# Altium PCB ArgoFC.PcbDoc (part 4 of 5)
Units mm, origin at the board's own origin, x right, y up, seen from the top; angles counter-clockwise.
Board outline 177.8 x 177.8 mm, 4 copper layers (Top Layer, GND Plane, PWR Plane, Bottom Layer), stack 0.603 mm thick; 373 components, 236 nets, 1289 pads, 686 vias.
Unrouted connection lines stored in the file: 16.
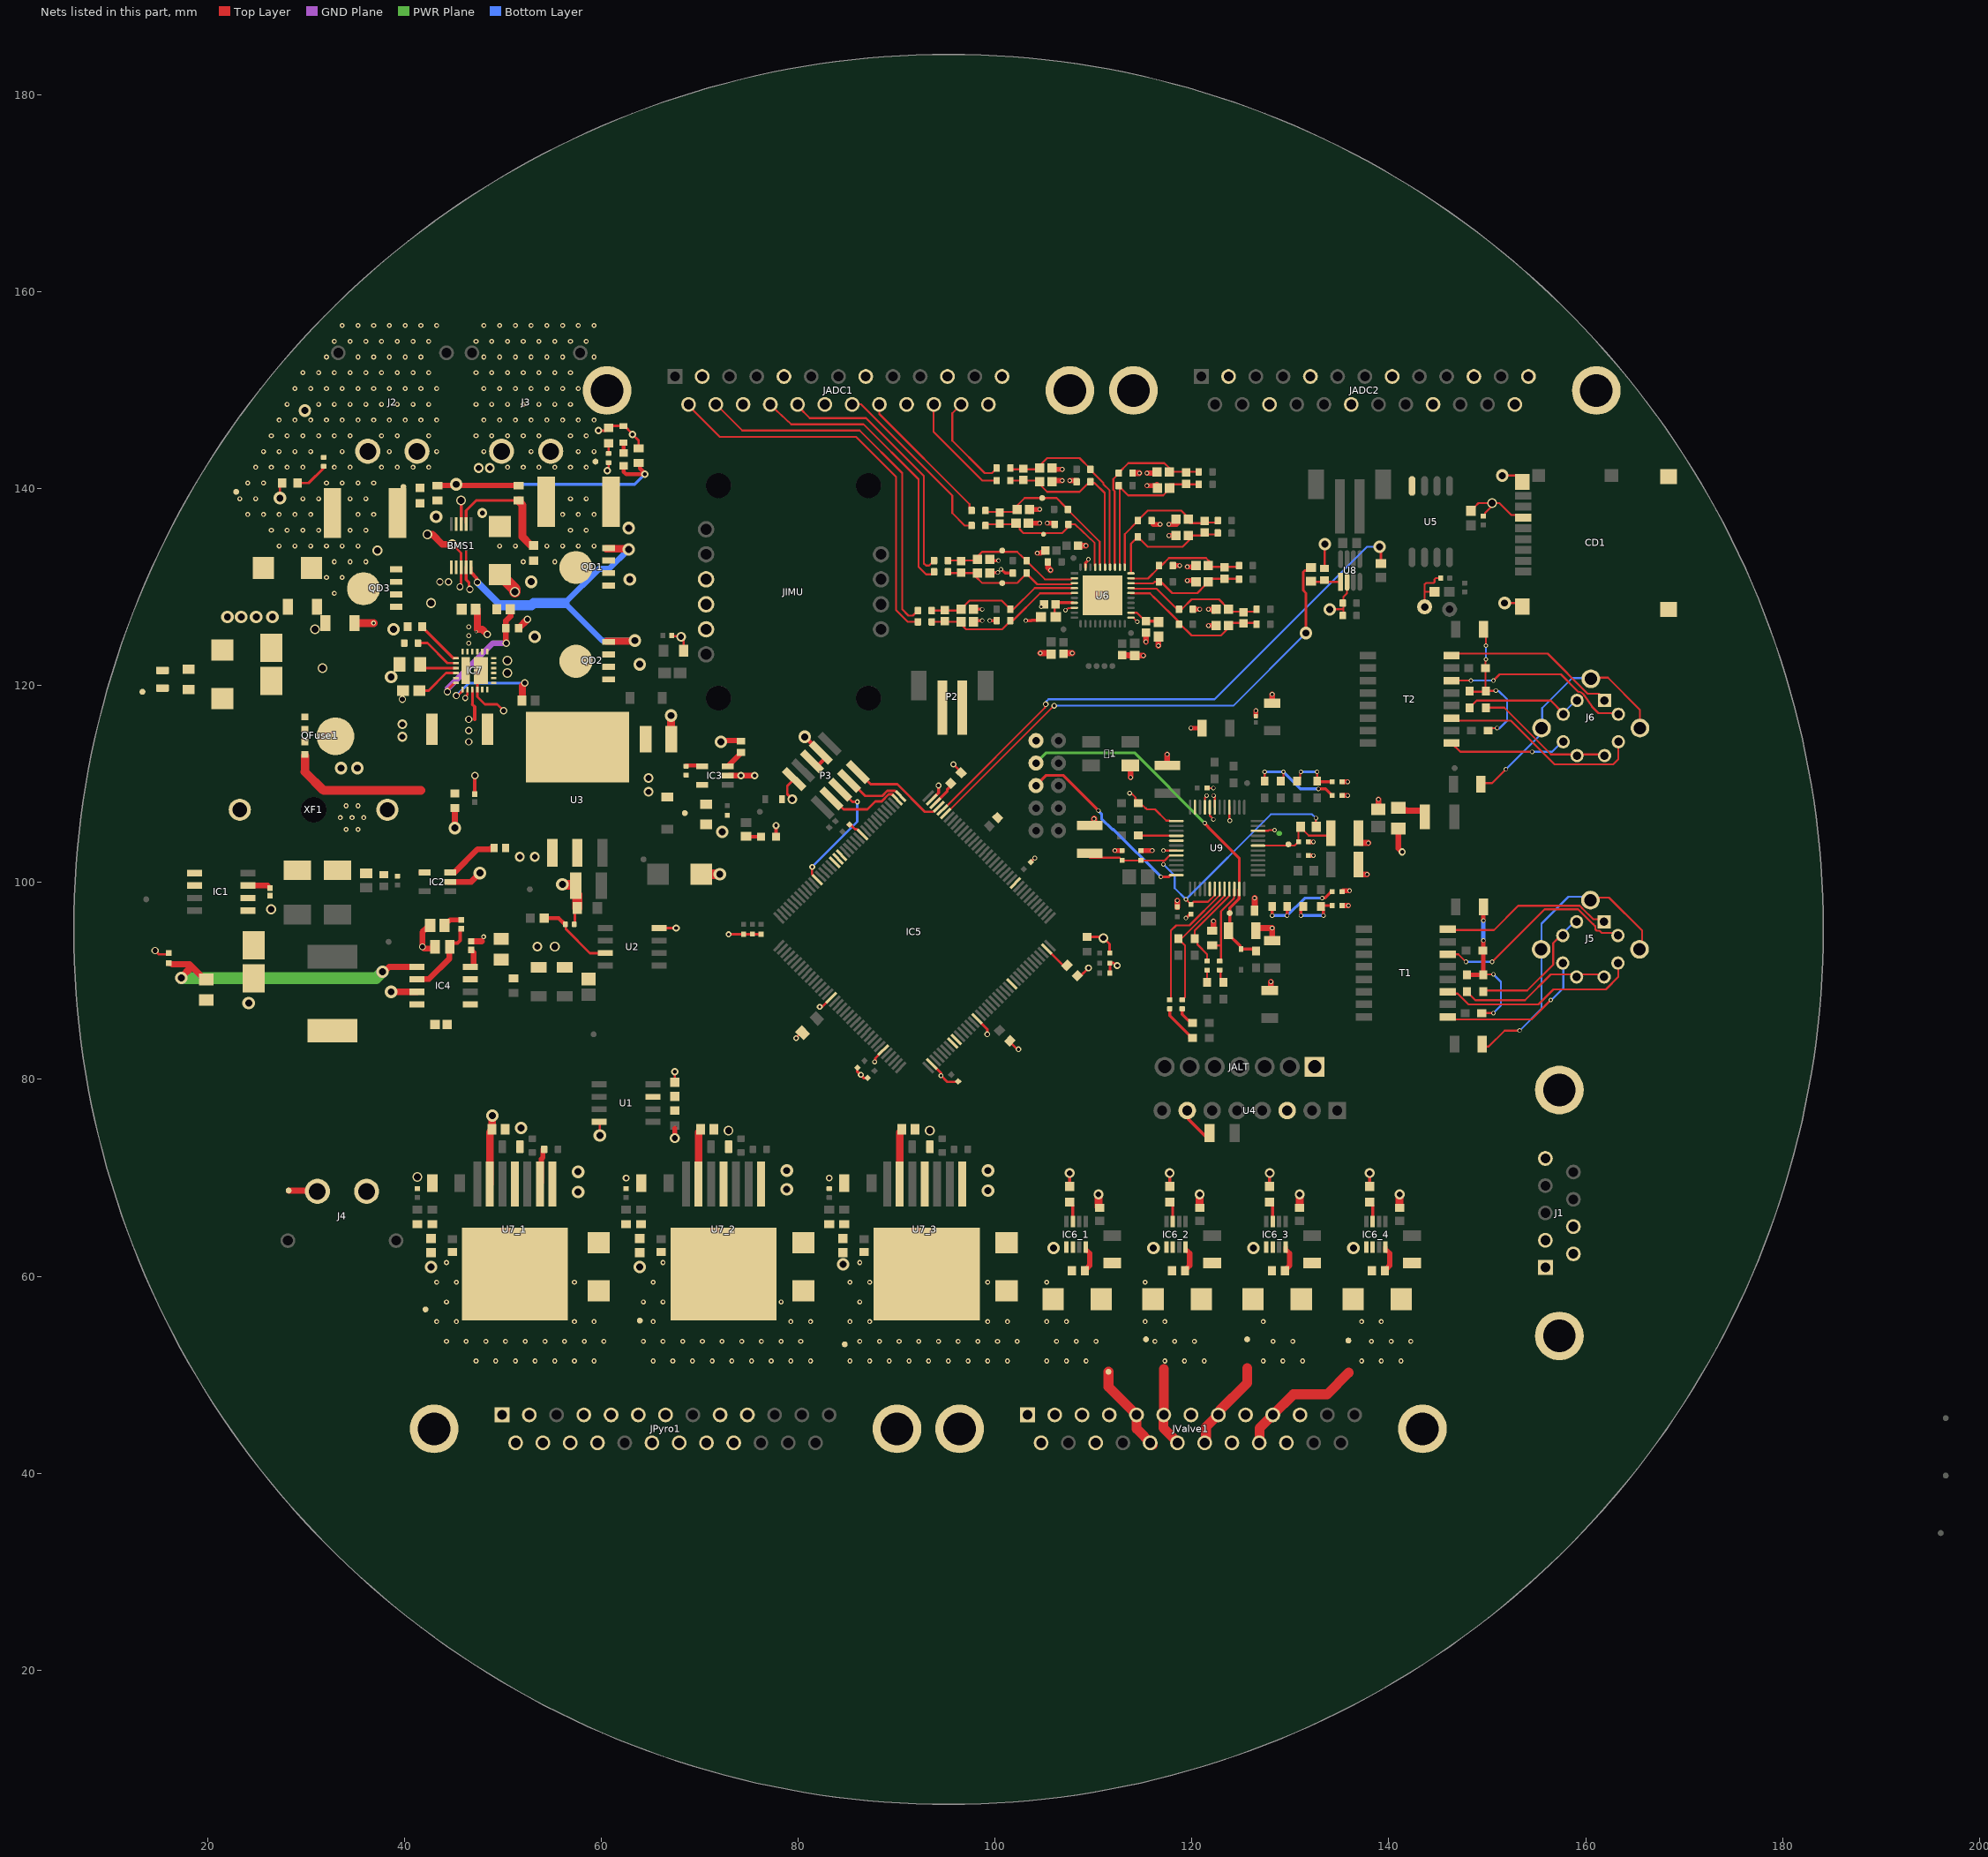
[diagram p5: the nets of this part, all layers, seen from the top]

## Via types
v1: diameter 0.5, hole 0.25, Top Layer to Bottom Layer, 327 vias
v2: diameter 0.45, hole 0.3, Top Layer to Bottom Layer, 147 vias
v3: diameter 1.27, hole 0.711, Top Layer to Bottom Layer, 80 vias
v4: diameter 1, hole 0.6, Top Layer to Bottom Layer, 28 vias
v5: diameter 1, hole 0.7, Top Layer to Bottom Layer, 21 vias
v6: diameter 0.75, hole 0.5, Top Layer to Bottom Layer, 17 vias
v7: diameter 0.5, hole 0.3, Top Layer to Bottom Layer, 15 vias
v8: diameter 0.7, hole 0.4, Top Layer to Bottom Layer, 14 vias
v9: diameter 0.75, hole 0.4, Top Layer to Bottom Layer, 12 vias
v10: diameter 0.6, hole 0.35, Top Layer to Bottom Layer, 7 vias
v11: diameter 0.6, hole 0.3, Top Layer to Bottom Layer, 5 vias
v12: diameter 0.7, hole 0.5, Top Layer to Bottom Layer, 3 vias
v13: diameter 0.6, hole 0.4, Top Layer to Bottom Layer, 2 vias
v14: diameter 2, hole 1.2, Top Layer to Bottom Layer, 2 vias
v15: diameter 7.62, hole 7.62, Top Layer to Bottom Layer, 2 vias
v16: diameter 1, hole 0.5, Top Layer to Bottom Layer, 1 vias
v17: diameter 0.711, hole 0.711, Top Layer to Bottom Layer, 1 vias
v18: diameter 1, hole 0.711, Top Layer to Bottom Layer, 1 vias
v19: diameter 0.3, hole 0.2, Top Layer to Bottom Layer, 1 vias

## Nets (pads, with @x,y where several pads share a name; then routed paths per layer and width w, separated by ;. In a path a pad name is that pad's centre, name@x,y a point inside that pad or via, vN(x,y) a via of type N, cw(c..) or ccw(c..) an arc to the next point about the centre after c; other vN are vias at no path point) (continued)
ENC28J60_RST_3.3V: C99.2 D14.1 pad.15 R72.2 TP30.1 U9.47 | length 36.4
  Top Layer w0.3: v2(121.285,106.045) 121.285,106.004 121.643,105.646 121.643,105.615 124.805,102.453 U9.47@124.805,99.354 ; C99.2@123.695,95.123 123.695,94.748 124.893,93.55 124.893,93.293 D14.1@124.968,93.218 ; C99.2@123.825,95.758 TP30.1@123.825,96.901 123.825,97.419 124.776,98.37 U9.47@124.776,99.325 ; D14.1@124.968,93.257 126.083,93.257 126.122,93.218 R72.2@126.365,93.218
  PWR Plane w0.3: pad.15@104.267,112.268 105.179,113.18 114.15,113.18 v2(121.285,106.045)
  Bottom Layer w0.3: pad.15@104.14,112.268 pad.15@104.267,112.268
ENC28J60_SCLK_3.3V: pad.16 U9.36 | length 19.3
  Top Layer w0.3: pad.16@104.14,109.855 105.179,110.894 106.911,110.894 v2(110.49,107.315) ; v2(116.84,100.584) 117.657,100.584 117.828,100.755 U9.36@118.404,100.755
  Bottom Layer w0.3: v2(110.49,107.315) 110.49,107.274 110.807,106.957 110.807,106.489 111.893,105.404 112.02,105.404 v2(116.84,100.584)
ETH_CRS_DV: U9.16 | length 1.3
  Top Layer w0.24: v7@123.805,106.32 U9.16@123.805,107.656
  other v7: 123.825,106.299
ETH_REF_CLK: U9.23
ETH_RXD0: IC5.127 U9.20 | length 1
  Top Layer w0.2: U9.20@121.793,107.315 121.793,106.807 v2(122.174,106.426)
ETH_RXD1: IC5.128 U9.19 | length 1.2
  Top Layer w0.2: U9.19@122.305,107.656 v2@122.305,108.824
  other v2: 122.185,108.839
ETH_TX_EN: IC5.126 R81.1 U9.25 | length 5.2
  Top Layer w0.2: v7@113.843,109.053 114.236,108.66 114.236,108.377 114.251,108.362 114.484,108.362 115.285,107.561 115.313,107.561 115.432,107.442 116.234,107.442 117.377,106.299 U9.25@117.729,106.299
  other v7: 113.665,109.093
ETH_TXD0: IC5.44 U9.29
ETH_TXD1: IC5.45 R85.2 U9.28 | length 3.2
  Top Layer w0.2: R85.2@114.515,104.775 U9.28@117.729,104.775
EXT_UART_RX_3.3V: P2.1
EXT_UART_TX_3.3V: P2.2
FDCAN2_RX: IC5.103 R68.1 | length 51.5
  Top Layer w0.2: IC5.103@94.973,107.012 95.007,107.012 105.958,117.964 v10(105.992,117.964)
  Top Layer w0.254: v3(131.572,125.349) 131.572,129.423 131.301,129.694 131.301,131.546 131.45,131.695 131.757,131.695 R68.1@132.08,132.018
  Bottom Layer w0.2: v10(105.992,117.964) 124.187,117.964 v3(131.572,125.349)
FDCAN2_TX: IC5.104 R69.1 | length 56.8
  Top Layer w0.2: IC5.104@95.123,107.823 105.062,117.762 105.062,118.051 v10(105.138,118.128)
  Top Layer w0.254: R69.1@139.192,132.334 v3@139.192,133.985
  Bottom Layer w0.2: v10(105.138,118.128) 105.215,118.204 105.215,118.423 105.41,118.618 122.301,118.618 137.795,134.112 v3(139.065,134.112)
GND: 1.2 BMS1.3 C1.1 C2.2 C3.2 C4.1 C5.1 C6.1 C7.2 C9.2 C10.2 C11.2 C12.2 C13.2 C14.1 C15.1 C20.2 C21.1 C22.2 C25.2 C26.2 C27.2 C28.2 C29.2 C30.2 C31.2 C32.2 C33.2 C34.2 C35.2 C36.2 C37.2 C38.2 C39.2 C40.2 C43_1.2 C43_2.2 C48.2 C49.2 C50.2 C51.2 C52_1.1 C52_2.1 C52_3.1 C52_4.1 C55.2 C57.2 C58.2 C59.2 C60.2 C61.2 C62.2 C64.2 C65.2 C67.2 C68.2 C70.2 C71.2 C72.2 C73.2 C74.2 C75.2 C77.2 C78.2 C79.2 C81.2 C82.2 C83.2 C84.2 C86.2 C87.2 C89.2 C91_1.1 C91_2.1 C91_3.1 C92.2 C93.2 C94.2 C97.2 C98.1 C99.1 C100.1 C101.2 C102.2 C103.2 C104.2 C105.2 C106.1 C107.2 C108.2 C109.1 C110.1 C111.1 C112.2 C113.2 C114.1 C117.2 C118.2 C121.1 CD1.6 CD1.11 CD1.12 CD1.13 CD1.14 Cg1.2 Citimer1.2 CRetry1.2 D1.2 D3.2 D5.2 D6.1 D7.1 D7_1.2 D7_2.2 D7_3.2 D9.2 D10.1 D11.2 D12.2 IC1.5 IC1.6 IC2.2 IC3.2 IC4.7 IC5.16 IC5.31 IC5.38 IC5.51 IC5.61 IC5.83 IC5.107 IC5.120 IC6_1.5 IC6_2.5 IC6_3.5 IC6_4.5 IC7.4 IC7.5 IC7.11 IC7.14 IC7.26 J1.5 J1.M1 J1.M2 J2.1 J3.1 J4.1 JADC1.2 JADC1.5 JADC1.8 JADC1.11 JADC1.13 JADC1.16 JADC1.19 JADC1.22 JADC1.25 JADC1.M1 JADC1.M2 JADC2.2 JADC2.5 JADC2.8 JADC2.11 JADC2.13 JADC2.16 JADC2.19 JADC2.22 JADC2.25 JADC2.M1 JADC2.M2 JALT.1 JIMU.3 JPyro1.4 JPyro1.5 JPyro1.9 JPyro1.10 JPyro1.16 JPyro1.17 JPyro1.21 JPyro1.22 JValve1.3 JValve1.4 JValve1.7 JValve1.9 JValve1.11 JValve1.16 JValve1.21 JValve1.23 JValve1.M1 JValve1.M2 P3.3 P3.5 P3.9 pad.8 pad.14 R1.1 R4.1 R5.1 R6.2 R7.2 R11.1 R12.1 R18_1.1 R18_2.1 R18_3.1 R18_4.1 R38.2 R39.2 R40.2 R41.2 R42.2 R43.2 R44.2 R45.2 R51.1 R58.2 R60.1 R61.1 R66_1.1 R66_2.1 R66_3.1 R67_1.1 R67_2.1 R67_3.1 R74.2 R75.2 R95.1 RC1.1 RIlimit1.1 RIMON1.1 RS2_1.2 RS2_2.2 RS2_3.2 U1.8 U2.8 U3.1 U4.3 U5.4 U6.8 U6.21 U6.39 U6.41 U7_1.1 U7_2.1 U7_3.1 U8.2 U9.10 U9.21 U9.31 U9.41 | length 187.8
  Top Layer w0.2: v2(107.139,127.671) 107.206,127.671 107.417,127.881 107.97,127.881 U6.8@107.995,127.907 ; v2(112.158,103.251) v2@112.162,103.247 ; C103.2@112.899,103.247 C103.2@112.903,103.243 ; 1.2@113.728,111.9 1.2@113.76,111.868 ; U6.21@113.747,126.909 114.01,126.909 v2(114.427,126.492) ; v2@115.943,103.243 v2(115.951,103.251) v2@115.953,103.253 ; v2(117.094,103.251) 117.098,103.255 U9.31@118.404,103.255 ; U9.21@121.305,107.656 121.313,107.664 121.313,108.604 121.481,108.771 v2(121.481,108.839) ; C108.2@121.658,109.601 v2(122.174,109.601) ; U9.10@126.706,105.255 126.714,105.263 127.772,105.263 127.843,105.334 v2(128.397,105.334) ; C94.2@133.477,131.965 v3@133.477,134.239 ; v3(133.985,127.762) 135.382,127.762 ; C93.2@135.317,127.127 135.382,127.192 135.382,127.762 ; U8.2@135.748,130.556 135.748,129.398 135.382,129.032 135.382,127.762 ; pad.8@143.637,128.016 143.637,129.54 ; C49.2@144.653,129.54 143.637,129.54 ; C48.2@145.288,130.937 144.78,130.937 144.653,130.81 144.653,130.546 144.536,130.429 143.764,130.429 143.637,130.302 143.637,129.54 ; C51.2@148.336,137.783 148.336,137.808 148.736,138.208 148.761,138.208 149.11,138.557 v5@150.368,138.557 ; C50.2@149.733,137.177 149.781,137.225 149.781,137.553 150.342,138.114 150.342,138.404 v5(150.495,138.557) 151.239,138.557 152.449,137.347 CD1.6@153.651,137.347 ; v3(151.511,141.351) CD1.14@153.561,141.351 ; v3(151.765,128.397) CD1.13@153.67,128.397 ; CD1.14@153.561,140.957 CD1.14@153.857,141.253
  Top Layer w0.254: v6(14.605,93.091) 14.621,93.091 15.002,92.71 15.858,92.71 R12.1@16.002,92.854 ; v3(27.305,139.065) 27.305,140.335 R61.1@27.432,140.462 ; v13(46.136,118.745) 46.136,118.866 46.36,119.09 IC7.14@46.36,119.465 ; v9(59.69,145.923) 60.411,145.923 60.706,146.218 60.706,146.397 D11.2@62.23,146.397 ; v3@59.817,74.422 U1.8@59.817,75.692 ; D11.2@62.23,146.392 62.33,146.392 63.119,145.603 v9(63.119,145.542) 63.754,144.907 R58.2@63.754,144.145 ; R5.1@67.056,125.095 67.12,125.031 68.008,125.031 v4(68.072,124.968) 68.072,124.766 68.326,124.512 C7.2@68.326,123.698 ; R1.1@67.437,80.01 v9(67.437,80.772) ; v11(72.898,94.742) C28.2@76.077,94.742 ; v4(79.375,108.458) 79.375,108.472 78.867,108.98 78.867,109.812 P3.9@79.569,110.514 ; v11(79.756,84.201) 80.264,84.709 C38.2@80.391,84.709 ; v11(82.169,87.376) 82.235,87.442 82.474,87.442 IC5.16@83.323,88.291 ; C29.2@85.016,105.891 85.126,105.78 85.196,105.851 85.323,105.851 85.755,105.419 85.945,105.419 86.473,104.891 IC5.120@86.505,104.891 ; v7(87.757,81.788) 87.804,81.835 87.804,82.165 IC5.31@88.627,82.988 ; IC5.107@93.726,108.585 IC5.107@93.726,108.626 ; IC5.38@93.853,81.28 94.488,80.645 v7(94.488,80.391) 95.123,79.756 C26.2@96.266,79.756 ; v10(95.758,112.014) C43_2.2@96.523,111.249 ; IC5.51@98.552,85.725 99.187,85.09 v10(99.187,84.582) ; C40.2@101.473,83.82 v10@102.235,83.058 ; C25.2@103.632,102.108 v7@103.886,102.362 ; C43_1.2@108.331,90.424 108.585,90.424 v8(109.474,91.313) ; C37.2@109.22,94.488 110.998,94.488 110.998,94.389 111.625,93.762 C27.2@111.625,92.837 ; C32.2@111.625,90.805 111.664,90.844 C31.2@111.664,91.821 ; C31.2@111.625,91.821 111.628,91.824 112.017,91.824 112.274,91.567 v8(112.395,91.567)
  Top Layer w0.3: BMS1.3@45.72,136.882 v5(45.72,138.811) ; R4.1@57.277,95.758 57.277,96.774 ; U2.8@65.405,95.377 v9@67.31,95.377 ; C34.2@85.979,81.159 85.979,80.772 86.614,80.137 C33.2@86.995,80.137 ; IC5.107@93.726,108.626 94.234,109.134 v10(94.234,109.855) ; C60.2@97.526,127.762 v2(98.679,127.762) ; C64.2@97.78,126.492 97.907,126.619 v2(98.679,126.619) ; C59.2@99.431,131.445 99.495,131.509 v2(100.266,131.509) ; C55.2@99.431,132.842 99.558,132.715 v2(100.33,132.715) ; v2(99.441,126.619) R39.2@100.138,126.619 ; v2(100.584,131.826) 100.624,131.826 101.006,131.445 R38.2@101.789,131.445 ; v2(103.107,126.619) 103.673,126.619 103.704,126.65 104.31,126.65 C72.2@104.66,127 ; v2(104.665,128.016) 104.919,128.27 C71.2@104.962,128.27 ; R18_1.1@107.569,69.088 v4(107.569,70.485) ; U6.39@109.166,132.015 109.166,132.494 109.474,132.801 v2(109.474,132.842) ; R18_2.1@117.729,69.088 v4(117.729,70.485) ; v2(119.38,96.393) 119.38,96.401 C104.2@119.888,96.909 ; R18_3.1@127.889,69.088 v4(127.889,70.485) ; R18_4.1@138.049,69.088 v4(138.049,70.485)
  Top Layer w0.35: C2.2@47.117,108.896 v6(47.117,110.871) ; D7.1@77.712,104.648 77.724,104.66 v8(77.724,105.791)
  Top Layer w0.4: v3(80.645,114.808) 80.654,114.808 82.633,112.829 82.633,112.82 82.651,112.802 82.651,112.58 P3.5@82.085,112.014
  Top Layer w0.45: v2(119.888,115.697) C111.1@121.028,115.697 ; C101.2@131.818,102.743 v2(132.334,102.743) ; C97.2@131.818,104.14 v2(132.334,104.14) ; C100.1@136.909,101.854 136.909,101.088 C100.1@137.159,100.838
  Top Layer w0.5: v3(67.056,116.967) v3@67.071,116.952 ; C89.2@103.495,136.398 103.622,136.525 v2(104.521,136.525) ; C87.2@103.495,137.668 103.749,137.922 v2(104.521,137.922) ; v2(104.267,133.477) 104.621,133.477 104.7,133.556 104.914,133.556 C79.2@105.089,133.731 ; v2(105.283,136.525) 105.965,136.525 106.045,136.445 R45.2@106.045,136.398 ; C84.2@105.654,142.113 105.781,141.986 v2(106.807,141.986) ; C86.2@105.781,140.843 v2(106.807,140.843) ; v2(107.569,140.843) R44.2@108.266,140.843 ; v2@112.162,103.247 C103.2@112.899,103.247 ; C105.2@114.808,103.243 v2@115.943,103.243 ; v2(115.413,140.335) 116.312,140.335 C78.2@116.439,140.462 ; v2(115.413,141.605) 116.312,141.605 C81.2@116.439,141.732 ; 116.058,136.398 v2(116.755,136.398) ; v2(117.644,135.255) C75.2@118.543,135.255 ; v2(117.644,136.398) 118.416,136.398 C77.2@118.543,136.525 ; R41.2@118.292,132.207 v2(118.745,132.207) ; v2(119.507,130.683) C68.2@120.269,130.683 ; v2(119.507,132.08) C70.2@120.396,132.08 ; R40.2@120.337,127.762 v2(120.777,127.762) ; v2(121.666,126.111) 122.314,126.111 C65.2@122.466,126.263 ; v2(121.666,127.762) 121.983,127.762 C67.2@122.212,127.533 ; C121.1@126.492,116.916 v2(126.492,117.475) ; C112.2@135.247,97.663 v2(135.89,97.663) ; C113.2@135.247,99.06 135.364,99.177 v2(136.007,99.177) ; C117.2@135.247,108.839 v2(135.821,108.839) ; C118.2@135.247,110.236 v2(135.821,110.236)
  Top Layer w0.55: v3@72.136,114.427 R7.2@74.168,114.427
  Top Layer w0.6: C22.2@42.581,95.758 42.581,95.607 42.354,95.38 42.203,95.38 41.783,94.96 v12(41.783,93.472) 41.81,93.472 41.998,93.284 42.89,93.284 C20.2@42.89,93.726 ; IC2.2@44.45,100.076 46.736,100.076 ; v3(45.085,105.537) Cg1.2@45.085,107.569 ; IC3.2@73.025,110.871 v9(75.565,110.871) ; v2(104.577,123.317) C58.2@105.654,123.317 ; C82.2@105.345,132.588 105.375,132.558 105.375,131.988 v2(105.621,131.742) ; C57.2@107.001,123.317 v2(107.823,123.317) ; C83.2@108.398,134.239 v2(109.22,134.239) ; C102.2@109.601,105.794 109.87,105.794 110.045,105.969 v2(110.045,106.489) ; C61.2@112.903,123.098 113.513,123.098 113.538,123.073 ; 113.538,123.063 v2(115.062,123.063) ; v2(113.76,110.687) 1.2@113.76,111.868 ; R43.2@113.954,141.605 v2(114.651,141.605) ; v2(115.316,124.46) C73.2@115.316,125.409 ; v2(116.586,124.079) 116.586,124.755 116.659,124.828 C74.2@116.713,124.828 ; C106.1@117.475,111.89 v2(117.475,113.03) ; C107.2@118.491,97.528 v2(118.491,98.171) ; R95.1@122.174,95.111 122.175,95.112 v2(122.175,96.08) ; R74.2@126.353,97.155 126.365,97.167 v2(126.365,98.425) ; C99.1@126.495,95.123 126.495,95.202 126.67,95.377 v2(128.143,95.377) C109.1@128.143,94.11 ; C110.1@127.889,89.03 128.016,89.157 v2(128.016,89.916) ; C114.1@128.143,118.24 v2(128.143,119.126) ; C98.1@136.909,105.029 136.909,104.204 137.084,104.029 137.906,104.029 v2(137.922,104.013) ; C100.1@137.159,100.838 v2(137.795,100.838) ; v2(138.938,108.458) 138.938,107.95 R75.2@139.065,107.823 ; RC1.1@140.97,105.503 140.97,103.475 141.321,103.124 v9(141.351,103.124)
  Top Layer w0.65: C21.1@46.736,94.039 47.82,94.039 ; 46.736,100.076 v3(47.625,100.965)
  Top Layer w0.7: v3(38.608,88.9) IC4.7@41.23,88.9 ; R60.1@51.577,125.857 52.441,126.721 52.441,126.736 v6(52.451,126.746)
  Top Layer w0.8: C4.1@34.876,126.365 v7(36.83,126.365) ; C11.2@67.071,114.696 v3@67.071,116.952 ; C52_1.1@110.49,67.056 v4(110.49,68.326) ; C52_2.1@120.777,67.056 v4(120.777,68.326) ; C52_3.1@130.937,67.056 v4(130.937,68.326) ; C52_4.1@141.097,67.056 v4(141.097,68.326)
  Top Layer w1: v3(56.007,99.822) 56.059,99.77 57.299,99.77 C12.2@57.374,99.695 57.374,98.945 57.522,98.797 C9.2@57.522,97.409 ; D3.2@70.145,100.838 v3(72.009,100.838)
  Top Layer w1.2: D9.2@49.53,130.937 50.051,130.937 51.181,129.807 v5(51.181,129.54)
  PWR Plane w0.5: 128.834,104.996 128.898,104.996
  other v3: 105.918,62.865 116.078,62.865 126.238,62.865 136.398,62.865 57.61,68.58 99.266,68.707 78.819,68.834 57.61,70.612 78.819,70.739 99.266,70.739 59.817,74.295 51.816,75.057 72.263,105.156 72.136,114.3 38.608,120.904 38.862,125.73 21.971,127 23.368,127 24.892,127 26.543,127 133.49,134.399
  other v4: 53.467,93.5 110.998,94.361 51.689,102.616 53.213,102.616
  other v5: 41.275,70.104 72.898,74.803 93.345,74.803 55.245,93.5 26.416,97.282
  other v6: 39.751,118.618
  other v7: 48.006,94.488 104.013,102.489 46.482,124.333 46.482,125.095 46.482,125.984
  other v8: 62.484,69.977 83.131,69.977
  other v9: 67.564,95.377 74.168,110.871
  other v10: 102.362,83.058
  other v11: 86.342,80.475
GPIO0: J1.1
GPIO1: J1.6
GPIO2: J1.2
GPIO3: J1.7
IMU_SCL_3.3V: JIMU.5
IMU_SDA_3.3V: JIMU.4
Isense1: IC6_1.3 R18_1.2 | length 2.1
  Top Layer w0.3: R18_1.2@107.569,67.526 107.579,67.526 107.879,67.226 IC6_1.3@107.879,65.562
Isense2: IC6_2.3 R18_2.2 | length 2.1
  Top Layer w0.3: R18_2.2@117.729,67.526 117.739,67.526 118.039,67.226 IC6_2.3@118.039,65.562
Isense3: IC6_3.3 R18_3.2 | length 2.1
  Top Layer w0.3: R18_3.2@127.889,67.526 127.899,67.526 128.199,67.226 IC6_3.3@128.199,65.562
Isense4: IC6_4.3 R18_4.2 | length 2.1
  Top Layer w0.3: R18_4.2@138.049,67.526 138.059,67.526 138.359,67.226 IC6_4.3@138.359,65.562
Isense5: R67_1.2 U7_1.6 | length 6.9
  Top Layer w0.75: U7_1.6@48.641,69.372 48.641,74.641 48.78,74.78 48.78,74.855 48.875,74.95 48.875,76.18 v3@48.895,76.2
  other v3: 48.895,76.327
Isense6: R67_2.2 U7_2.6 | length 5.3
  Top Layer w0.75: U7_2.6@69.85,69.372 R67_2.2@69.85,74.641
Isense7: R67_3.2 U7_3.6 | length 5.3
  Top Layer w0.75: U7_3.6@90.297,69.372 R67_3.2@90.297,74.641
JTCK: IC5.109 P3.4 | length 4.5
  Top Layer w0.254: P3.4@86.106,109.474 86.774,108.806 88.533,108.806 89.035,109.308 89.828,109.308 IC5.109@90.043,109.093
JTDI: IC5.110 P3.8 | length 6
  Top Layer w0.254: P3.8@84.328,107.696 84.582,107.442 86.995,107.442 87.8,108.247 88.459,108.247 89.167,108.955 89.546,108.955 IC5.110@89.599,108.902
JTDO: IC5.133 P3.6 | length 11.5
  Top Layer w0.254: 81.407,100.838 81.381,100.864 81.381,101.574 v11(81.407,101.6) ; P3.6@84.243,109.432 85.471,108.204 v7(85.979,108.204)
  Bottom Layer w0.254: v11(81.407,101.6) 85.979,106.172 v7(85.979,108.204)
JTMS: IC5.105 P3.2 | length 9.6
  Top Layer w0.254: P3.2@86.039,111.228 86.102,111.228 87.348,109.982 90.043,109.982 92.837,107.188 93.702,107.188 93.899,107.385 IC5.105@93.932,107.385
LOAD_1: C54_1.2 D8_1.1 IC6_1.6 JValve1.5 JValve1.18 TP15_1.1 | length 9.3
  Top Layer w1: TP15_1.1@111.506,50.292 111.506,48.774 JValve1.5@114.36,45.92 114.36,44.517 JValve1.18@115.99,42.887
  other v1: 105.235,51.395 107.235,51.395 109.235,51.395 106.235,53.395 108.235,53.395 110.235,53.395 105.235,55.395 107.235,55.395 105.235,59.395
LOAD_2: C54_2.2 D8_2.1 IC6_2.6 JValve1.6 JValve1.19 TP15_2.1 | length 7.5
  Top Layer w1: JValve1.6@117.094,45.593 117.094,44.577 JValve1.19@118.364,43.307 ; JValve1.6@117.13,45.92 117.13,50.601
  other v1: 117.235,51.395 119.235,51.395 121.235,51.395 116.235,53.395 118.235,53.395 120.235,53.395 115.235,55.395 117.235,55.395 115.235,59.395
LOAD_3: C54_3.2 D8_3.1 IC6_3.6 JValve1.8 JValve1.20 TP15_3.1 | length 8.8
  Top Layer w1: JValve1.20@121.412,43.18 121.381,43.211 121.381,43.529 121.412,43.561 121.412,44.662 JValve1.8@122.67,45.92 ; JValve1.8@122.809,46.355 125.603,49.149 125.603,50.673
  other v1: 127.235,51.395 129.235,51.395 131.235,51.395 128.235,53.395 130.235,53.395 127.235,55.395
LOAD_4: C54_4.2 D8_4.1 IC6_4.6 JValve1.10 JValve1.22 TP15_4.1 | length 12.9
  Top Layer w1: JValve1.22@126.873,43.053 126.873,44.583 JValve1.10@128.21,45.92 130.296,48.006 133.731,48.006 135.937,50.212
  other v1: 137.235,51.395 139.235,51.395 141.235,51.395 138.235,53.395 140.235,53.395 142.235,53.395 137.235,55.395 139.235,55.395
LOAD_5: C92_1.1 D7_1.1 JPyro1.1 JPyro1.2 JPyro1.14 JPyro1.15 RS1_1.1 TP28_1.1 U7_1.4 U7_1.8
  other v1: 47.235,51.395 49.235,51.395 51.235,51.395 53.235,51.395 55.235,51.395 57.235,51.395 59.235,51.395 44.235,53.395 46.235,53.395 48.235,53.395 50.235,53.395 52.235,53.395 54.235,53.395 56.235,53.395 58.235,53.395 60.235,53.395 43.235,55.395 45.235,55.395 57.235,55.395 59.235,55.395 44.235,57.395 43.235,59.395 45.235,59.395 57.235,59.395 44.235,61.395
  other v3: 42.672,60.959
LOAD_6: C92_2.1 D7_2.1 JPyro1.6 JPyro1.7 JPyro1.19 JPyro1.20 RS1_2.1 TP28_2.1 U7_2.4 U7_2.8
  other v1: 65.235,51.395 67.235,51.395 69.235,51.395 71.235,51.395 73.235,51.395 75.235,51.395 77.235,51.395 79.235,51.395 81.235,51.395 64.235,53.395 66.235,53.395 68.235,53.395 70.235,53.395 72.235,53.395 74.235,53.395 76.235,53.395 78.235,53.395 80.235,53.395 65.235,55.395 79.235,55.395 81.235,55.395 64.235,57.395 66.235,57.395 78.235,57.395 65.235,59.395 66.235,61.395
  other v3: 63.881,60.959
LOAD_7: C92_3.1 D7_3.1 JValve1.1 JValve1.2 JValve1.14 RS1_3.1 TP28_3.1 U7_3.4 U7_3.8
  other v1: 85.235,51.395 87.235,51.395 89.235,51.395 91.235,51.395 93.235,51.395 95.235,51.395 97.235,51.395 99.235,51.395 101.235,51.395 86.235,53.395 88.235,53.395 90.235,53.395 92.235,53.395 94.235,53.395 96.235,53.395 98.235,53.395 100.235,53.395 102.235,53.395 85.235,55.395 87.235,55.395 99.235,55.395 101.235,55.395 86.235,57.395 85.235,59.395 87.235,59.395 99.235,59.395 86.235,61.395
  other v3: 84.528,61.214
Net1_3: 1.3 TP31.1 U9.14 | length 17.6
  Top Layer w0.3: 1.3@113.665,114.3 113.781,114.184 123.941,114.184 125.603,112.522 125.603,109.982 124.805,109.184 U9.14@124.805,107.91
NetBMS1_2: BMS1.2 R52.1 R53.2 | length 12.1
  Top Layer w0.28: BMS1.2@46.228,136.525 46.228,137.795 47.256,138.823 R53.2@51.562,138.823
  Top Layer w0.8: R53.2@51.562,138.823 51.662,138.823 51.662,138.647 51.955,138.354 51.955,135.131 R52.1@52.751,134.335
NetBMS1_4: BMS1.4 R57.2 R59.2
  other v3: 43.18,137.16
NetBMS1_6: BMS1.6 QD3.4
NetBMS1_7: BMS1.7 D12.1 DQ2.1 J2.2 LED2.2 QD3.5-6-7-8 TP26.1
  other v1: 32.835,129.395 32.035,130.995 33.635,130.995 32.835,132.595 34.435,132.595 36.035,132.595 27.235,134.195 28.835,134.195 30.435,134.195 32.035,134.195 33.635,134.195 35.235,134.195 26.435,135.795 28.035,135.795 29.635,135.795 31.235,135.795 34.435,135.795 36.035,135.795 24.035,137.395 25.635,137.395 27.235,137.395 28.835,137.395 30.435,137.395 35.235,137.395 36.835,137.395 23.235,138.995 24.835,138.995 29.635,138.995 31.235,138.995 34.435,138.995 36.035,138.995 24.035,140.595 25.635,140.595 32.035,140.595 33.635,140.595 35.235,140.595 36.835,140.595 24.835,142.195 26.435,142.195 28.035,142.195 29.635,142.195 32.835,142.195 34.435,142.195 37.635,142.195 39.235,142.195 40.835,142.195 42.435,142.195 25.635,143.795 27.235,143.795 28.835,143.795 30.435,143.795 33.635,143.795 38.435,143.795 43.235,143.795 26.435,145.395 28.035,145.395 29.635,145.395 31.235,145.395 32.835,145.395 34.435,145.395 37.635,145.395 39.235,145.395 42.435,145.395 27.235,146.995 28.835,146.995 30.435,146.995 32.035,146.995 33.635,146.995 35.235,146.995 36.835,146.995 38.435,146.995 40.035,146.995 41.635,146.995 43.235,146.995 28.035,148.595 31.235,148.595 32.835,148.595 34.435,148.595 36.035,148.595 37.635,148.595 39.235,148.595 40.835,148.595 42.435,148.595 28.835,150.195 30.435,150.195 32.035,150.195 33.635,150.195 35.235,150.195 36.835,150.195 38.435,150.195 40.035,150.195 41.635,150.195 43.235,150.195 29.635,151.795 31.235,151.795 32.835,151.795 34.435,151.795 36.035,151.795 37.635,151.795 39.235,151.795 40.835,151.795 42.435,151.795 32.035,153.395 35.235,153.395 36.835,153.395 38.435,153.395 40.035,153.395 41.635,153.395 32.835,154.995 34.435,154.995 36.035,154.995 37.635,154.995 39.235,154.995 40.835,154.995 42.435,154.995 33.635,156.595 35.235,156.595 36.835,156.595 38.435,156.595 40.035,156.595 41.635,156.595 43.235,156.595
  other v3: 29.845,147.955
  other v5: 37.211,133.731
  other v6: 43.561,130.556 44.45,130.556
NetBMS1_8: BMS1.8 DQ2.2 IC7.1 IC7.2 IC7.3 IC7.16 IC7.25 QD2.5-6-7-8 QD3.1 QD3.2 QD3.3 R54.2 R59.1 TP24.1 XF1.1 | length 15.9
  Top Layer w0.254: v5(44.831,134.366) 45.72,133.477 BMS1.8@45.72,132.039 ; v12(45.593,130.048) 45.72,130.175 BMS1.8@45.72,131.953 ; IC7.25@47.371,120.65 47.371,119.626 47.374,119.623 47.374,118.869 48.133,118.11 49.403,118.11 v6(50.038,117.475)
  Top Layer w0.5: v5(42.291,135.382) 42.799,135.382
  Top Layer w0.7: 42.799,135.382 43.815,134.366 v5(44.831,134.366) ; R54.2@47.371,127.762 47.371,125.73 47.865,125.73 48.373,125.222 v6(48.387,125.222)
  other v3: 53.213,124.968
  other v5: 42.672,128.397
  other v19: 47.244,125.476
NetBMS1_9: BMS1.9 D9.1 DQ1.1 J3.2 LED1.2 QD1.5-6-7-8 R52.2 TP23.1 | length 5.1
  Top Layer w0.254: BMS1.9@46.228,132.08 v17@46.228,133.858 ; v9(60.579,141.859) 60.706,141.986 LED1.2@60.706,142.674
  Top Layer w0.3: BMS1.9@46.228,132.08 46.228,130.769 46.523,130.474 46.523,129.88 v6(46.609,129.794)
  other v1: 52.035,132.595 55.235,132.595 49.635,134.195 51.235,134.195 54.435,134.195 56.035,134.195 57.635,134.195 59.235,134.195 56.835,135.795 58.435,135.795 56.035,137.395 57.635,137.395 59.235,137.395 56.835,138.995 58.435,138.995 50.435,142.195 52.035,142.195 53.635,142.195 55.235,142.195 56.835,142.195 58.435,142.195 48.035,143.795 52.835,143.795 57.635,143.795 59.235,143.795 47.235,145.395 48.835,145.395 50.435,145.395 52.035,145.395 53.635,145.395 56.835,145.395 58.435,145.395 48.035,146.995 49.635,146.995 51.235,146.995 52.835,146.995 54.435,146.995 56.035,146.995 57.635,146.995 59.235,146.995 47.235,148.595 48.835,148.595 50.435,148.595 52.035,148.595 53.635,148.595 55.235,148.595 56.835,148.595 48.035,150.195 49.635,150.195 51.235,150.195 52.835,150.195 54.435,150.195 56.035,150.195 57.635,150.195 47.235,151.795 48.835,151.795 50.435,151.795 52.035,151.795 53.635,151.795 55.235,151.795 56.835,151.795 48.035,153.395 49.635,153.395 51.235,153.395 52.835,153.395 54.435,153.395 56.035,153.395 59.235,153.395 47.235,154.995 48.835,154.995 50.435,154.995 52.035,154.995 53.635,154.995 55.235,154.995 56.835,154.995 58.435,154.995 48.035,156.595 49.635,156.595 51.235,156.595 52.835,156.595 54.435,156.595 56.035,156.595 57.635,156.595 59.235,156.595
  other v3: 52.832,130.556
  other v4: 47.498,142.113 48.641,142.113
  other v16: 47.879,137.541
  other v17: 46.228,134.112
NetBMS1_10: BMS1.10 QD1.4 QD2.4 | length 34.2
  Top Layer w0.3: BMS1.10@46.72,131.715 BMS1.10@46.72,132.039
  Top Layer w0.32: v6@47.289,130.582 v6(47.371,130.5)
  Top Layer w0.35: BMS1.10@46.73,131.499 47.289,130.94
  Top Layer w0.36: v6@47.289,130.582 47.289,130.94
  Top Layer w0.75: QD1.4@60.464,133.921 62.674,133.921 v3@62.738,133.858 ; QD2.4@60.5,124.523 63.309,124.523 v3(63.373,124.587)
  Bottom Layer w0.6: v3@62.738,133.858 60.752,131.872 59.736,131.872 56.261,128.397 60.071,124.587 v3(63.373,124.587)
  Bottom Layer w0.7: v6(47.371,130.5) 49.697,128.174 ; 52.868,128.174 53.091,128.397
  Bottom Layer w1: 49.697,128.174 52.868,128.174 ; 53.091,128.397 56.261,128.397
  other v3: 62.75,133.858
NetC1_2: C1.2 IC1.7 | length 2.3
  Top Layer w0.55: C1.2@26.044,99.695 C1.2@26.289,99.45
  Top Layer w0.6: IC1.7@24.048,99.695 C1.2@26.044,99.695
NetC3_1: C3.1 C4.2 C5.2 C6.2 D1.1 D10.2 IC1.1 IC1.2 J4.2 QFuse1.1 QFuse1.2 QFuse1.3 TP1.1 TP25.1 XF1.2 | length 2.7
  Top Layer w0.6: TP25.1@28.194,68.707 J4.2@30.861,68.707
  other v5: 31.623,121.793 30.861,125.73
NetC8_1: C8.1 IC4.1
NetC8_2: C8.2 D6.2 IC4.8 L1.1 R9.2
  other v3: 24.13,87.757
NetC10_1: C10.1 C11.1 D4.1 IC3.5 Rpl2.2 TP8.1 U3.2 U3.4
  other v4: 64.77,109.22 64.77,110.617
NetC16_1: C16.1 C17.1 C18.2 C19.2
NetC20_1: C20.1 IC4.6 R10.2 | length 7.6
  Top Layer w0.35: C20.1@44.704,93.218 44.704,93.711 44.865,93.872 45.358,93.872 45.609,94.123 R10.2@45.609,95.25
  Top Layer w0.6: IC4.6@41.693,90.195 42.443,90.195 44.531,92.283 44.531,93.438 C20.1@44.565,93.472
NetC21_2: C21.2 IC4.4 | length 2.1
  Top Layer w0.6: IC4.4@46.654,91.44 46.965,91.44 46.99,91.465 46.99,92.885 C21.2@46.746,93.129
NetC22_1: C22.1 R10.1 | length 2
  Top Layer w0.5: C22.1@44.033,95.631 44.033,95.782 44.31,96.059 44.435,96.059 44.603,96.227 R10.1@45.734,96.227
NetC43_1_1: C43_1.1 IC5.71 | length 2.3
  Top Layer w0.254: IC5.71@105.537,92.964 107.061,91.44 C43_1.1@107.061,91.313
NetC43_2_1: C43_2.1 IC5.106 | length 2.7
  Top Layer w0.3: IC5.106@93.913,108.073 95.123,109.283 95.123,109.492 95.482,109.85 C43_2.1@95.482,110.087
NetC54_1_1: C54_1.1 IC6_1.8 | length 2.8
  Top Layer w0.45: IC6_1.8@109.179,62.662 IC6_1.8@109.179,62.962 ; IC6_1.8@109.204,62.637 IC6_1.8@109.283,62.637
  Top Layer w0.5: C54_1.1@109.093,60.579 109.093,60.609 109.283,60.799 C54_1.1@109.308,60.799 ; IC6_1.8@109.283,62.637 109.601,62.319
  Top Layer w0.55: C54_1.1@109.308,60.799 109.601,61.092 109.601,62.319
NetC54_2_1: C54_2.1 IC6_2.8 | length 2.8
  Top Layer w0.45: IC6_2.8@119.339,62.662 IC6_2.8@119.339,62.962 ; IC6_2.8@119.364,62.637 IC6_2.8@119.443,62.637
  Top Layer w0.5: C54_2.1@119.253,60.579 119.253,60.609 119.443,60.799 C54_2.1@119.468,60.799 ; IC6_2.8@119.443,62.637 119.761,62.319
  Top Layer w0.55: C54_2.1@119.468,60.799 119.761,61.092 119.761,62.319
NetC54_3_1: C54_3.1 IC6_3.8 | length 2.8
  Top Layer w0.45: IC6_3.8@129.499,62.662 IC6_3.8@129.499,62.962 ; IC6_3.8@129.524,62.637 IC6_3.8@129.603,62.637
  Top Layer w0.5: C54_3.1@129.413,60.579 129.413,60.609 129.603,60.799 C54_3.1@129.628,60.799 ; IC6_3.8@129.603,62.637 129.921,62.319
  Top Layer w0.55: C54_3.1@129.628,60.799 129.921,61.092 129.921,62.319
NetC54_4_1: C54_4.1 IC6_4.8 | length 2.8
  Top Layer w0.45: IC6_4.8@139.659,62.662 IC6_4.8@139.659,62.962 ; IC6_4.8@139.684,62.637 IC6_4.8@139.763,62.637
  Top Layer w0.5: C54_4.1@139.573,60.579 139.573,60.609 139.763,60.799 C54_4.1@139.788,60.799 ; IC6_4.8@139.763,62.637 140.081,62.319
  Top Layer w0.55: C54_4.1@139.788,60.799 140.081,61.092 140.081,62.319
NetC55_1: C55.1 C56.1 R19.2 R24.1 TP16.1 U6.2 | length 12.9
  Top Layer w0.2: R19.2@95.377,132.715 95.885,132.715 96.841,132.715 C56.1@96.901,132.655 ; 97.028,132.715 98.054,132.715 C55.1@98.181,132.842 ; C55.1@98.298,133.223 98.667,133.592 ; 98.667,133.604 100.711,133.604 101.473,133.604 102.235,133.604 102.844,132.995 ; R24.1@103.259,132.596 105.044,130.81 107.731,130.81
NetC55_1_1: C55_1.1 D8_1.2
NetC55_2_1: C55_2.1 D8_2.2
NetC55_3_1: C55_3.1 D8_3.2
NetC55_4_1: C55_4.1 D8_4.2
NetC56_2: C56.2 C59.1 R20.2 R38.1 TP17.1 U6.3 | length 13.4
  Top Layer w0.2: R20.2@95.25,131.445 96.52,131.445 C59.1@98.181,131.445 ; C59.1@98.044,131.064 98.679,130.429 TP17.1@100.711,130.429 101.6,130.429 102.235,130.429 102.362,130.556 ; 102.362,130.568 R38.1@103.189,131.395 ; R38.1@103.419,131.15 104.267,130.302 107.765,130.302
NetC60_1: C60.1 C63.1 R21.2 R25.1 U6.4 | length 15.5
  Top Layer w0.2: R21.2@93.853,127.635 94.234,127.635 96.403,127.635 C60.1@96.53,127.762 ; C60.1@96.52,128.016 96.784,128.016 96.905,128.137 96.905,128.158 97.398,128.651 100.649,128.651 101.258,128.042 101.308,128.042 101.538,127.812 R25.1@101.538,127.762 ; R25.1@101.854,127.762 101.854,127.764 104.011,129.921 107.737,129.921 107.762,129.897 108.021,129.897 U6.4@108.031,129.907
NetC63_2: C63.2 C64.1 R22.2 R39.1 U6.5 | length 16
  Top Layer w0.2: R22.2@93.726,126.492 94.869,126.492 C64.1@96.53,126.492 ; C64.1@96.393,126.111 96.647,126.111 97.028,125.73 100.711,125.73 100.838,125.857 100.838,125.869 R39.1@101.538,126.569 ; R39.1@101.797,126.619 104.567,129.389 107.737,129.389 107.762,129.413 108.03,129.413 U6.5@108.041,129.403 ; R39.1@101.538,126.569 R39.1@101.538,126.619 R39.1@101.538,126.569
NetC65_1: C65.1 C66.1 R23.2 R26.1 U6.26 | length 14.8
  Top Layer w0.2: U6.26@113.792,129.389 115.721,129.389 116.28,128.83 116.318,128.83 118.618,126.53 R26.1@118.618,126.492 ; R26.1@118.708,126.341 119.954,125.095 122.939,125.095 C65.1@123.726,125.882 ; C65.1@123.726,126.39 R23.2@126.582,126.39
NetC66_2: C66.2 C67.1 R32.2 R40.1 U6.27 | length 14.6
  Top Layer w0.2: U6.27@113.792,129.895 113.803,129.905 114.107,129.905 114.16,129.853 116.4,129.853 118.44,127.813 118.478,127.813 R40.1@118.708,127.583 ; R40.1@118.708,127.533 R40.1@118.708,127.583 ; C67.1@123.716,127.533 R32.2@126.52,127.533 ; C67.1@123.726,127.914 123.599,127.914 122.735,128.778 119.953,128.778 118.988,127.813 118.938,127.813 R40.1@118.708,127.583
NetC68_1: C68.1 C69.1 R27.1 R33.2 U6.28 | length 12.8
  Top Layer w0.2: U6.28@113.792,130.389 116.038,130.389 116.205,130.556 116.408,130.556 R27.1@116.625,130.773 ; R27.1@116.638,130.76 117.985,129.413 120.534,129.413 121.271,130.15 121.271,130.435 C68.1@121.773,130.937 ; C68.1@121.656,130.556 121.97,130.87 124.716,130.87 R33.2@124.776,130.81
NetC69_2: C69.2 C70.1 R34.2 R41.1 U6.29 | length 12.5
  Top Layer w0.2: U6.29@113.792,130.889 115.522,130.889 R41.1@116.586,131.953 ; R41.1@116.638,132.003 116.868,132.233 116.918,132.233 117.654,132.969 121.412,132.969 C70.1@121.793,132.588 ; C70.1@121.327,132.536 C70.1@121.656,132.207 ; C70.1@121.646,132.08 122.799,132.08 ; 122.859,132.08 123.432,132.08 R34.2@124.766,132.08
NetC71_1: C71.1 C72.1 U6.7 | length 2.9
  Top Layer w0.2: C72.1@106.045,126.94 C71.1@106.045,128.143 ; C71.1@106.045,128.203 C71.1@106.112,128.27
  Top Layer w0.3: C71.1@106.299,128.43 U6.7@107.892,128.43
NetC73_1: C73.1 C74.1 U6.22 | length 2.8
  Top Layer w0.2: U6.22@113.747,127.409 114.399,127.409 C73.1@115.189,126.619
  Top Layer w0.3: C73.1@115.57,126.559 116.526,126.559 C74.1@116.586,126.619
NetC75_1: C75.1 C76.1 R28.1 R35.2 U6.30 | length 12.2
  Top Layer w0.2: U6.30@113.792,131.389 113.792,134.431 R28.1@114.489,135.128 114.489,135.078 114.719,134.848 114.769,134.848 115.505,134.112 119.041,134.112 C75.1@119.803,134.874 ; C75.1@119.793,135.255 120.819,135.255 ; C76.1@121.2,135.382 R35.2@122.301,135.382
NetC76_2: C76.2 C77.1 R36.2 R42.1 U6.31 | length 13.4
  Top Layer w0.2: U6.31@113.157,132.207 113.166,132.216 113.166,135.407 114.489,136.729 R42.1@114.489,136.779 ; R42.1@114.489,136.829 114.719,137.059 114.769,137.059 115.505,137.795 118.914,137.795 C77.1@119.803,136.906 ; C77.1@119.793,136.525 120.819,136.525 ; C76.2@121.158,136.592 R36.2@122.361,136.592
NetC78_1: C78.1 C80.1 R29.1 R37.2 U6.32 | length 17
  Top Layer w0.2: R29.1@112.554,140.285 112.577,140.263 113.508,139.331 117.076,139.331 C78.1@117.826,140.081 ; R29.1@112.554,140.335 112.649,140.24 U6.32@112.649,132.334 ; C78.1@117.729,140.462 R37.2@120.682,140.462
NetC80_2: C80.2 C81.1 R43.1 R46.2 U6.33 | length 18.4
  Top Layer w0.2: 111.997,140.761 112.004,140.768 ; U6.33@112.141,132.207 112.141,139.765 111.997,139.909 111.997,140.998 112.554,141.555 R43.1@112.554,141.605 ; R43.1@112.554,141.655 113.52,142.621 117.191,142.621 C81.1@117.699,142.113 ; C81.1@117.729,141.732 R46.2@120.682,141.732
NetC84_1: C84.1 C85.1 R30.1 R47.2 U6.34 | length 19.3
  Top Layer w0.2: R47.2@101.6,141.986 104.404,141.986 C84.1@104.531,142.113 ; C84.1@104.521,142.494 104.648,142.494 105.283,143.129 108.573,143.129 109.666,142.036 R30.1@109.666,141.986 ; R30.1@109.766,141.986 109.766,141.837 110.998,140.604 110.998,140.462 111.633,139.827 U6.34@111.633,132.334
NetC85_2: C85.2 C86.1 R44.1 R48.2 U6.35 | length 18.3
  Top Layer w0.2: R48.2@101.6,140.97 101.727,140.843 102.87,140.843 C86.1@104.531,140.843 ; C86.1@104.521,140.462 105.283,139.7 108.573,139.7 109.666,140.793 R44.1@109.666,140.843 ; R44.1@109.682,140.809 109.896,140.594 110.104,140.594 111.121,139.577 U6.35@111.121,132.207
NetC87_1: C87.1 C88.1 R31.1 R49.2 TP21.1 U6.36 | length 16
  Top Layer w0.2: R49.2@99.06,137.668 100.397,137.668 C88.1@100.457,137.608 ; C88.1@100.457,137.668 C87.1@102.245,137.668 ; C87.1@102.235,138.303 102.997,139.065 TP21.1@104.775,139.065 ; TP21.1@104.902,139.123 104.96,139.065 106.237,139.065 107.1,138.202 107.15,138.202 107.38,137.972 107.38,137.872 110.617,134.635 U6.36@110.617,132.334
NetC88_2: C88.2 C89.1 R45.1 R50.2 TP22.1 U6.37 | length 15
  Top Layer w0.2: R50.2@99.06,136.398 100.397,136.398 C88.2@100.457,136.458 ; C88.2@100.457,136.398 C89.1@101.981,136.398 ; C89.1@102.118,136.525 101.981,136.388 102.23,136.388 102.468,136.15 102.468,135.901 102.86,135.509 104.902,135.509 106.807,135.509 R45.1@107.405,136.107 ; R45.1@107.215,136.118 107.232,136.135 R45.1@107.232,136.185 ; R45.1@107.569,136.398 108.096,136.398 110.109,134.493 U6.37@110.109,132.207
NetC94_1: C94.1 R68.2 U8.1 | length 2.9
  Top Layer w0.2: R68.2@132.207,130.556 133.35,130.556 U8.1@135.098,130.556
NetC97_1: C97.1 C98.2 FB2.1 TP29.1 U9.7 | length 8.7
  Top Layer w0.2: U9.7@126.96,103.755 129.54,103.755 130.175,103.755 130.433,103.755 C97.1@130.683,104.005 ; C97.1@130.818,104.14 130.818,105.456 FB2.1@131.026,105.664 131.026,105.614 131.865,104.775 C98.2@133.858,104.775
NetC102_1: C102.1 C103.1 C104.1 C105.1 FB2.2 U9.32 U9.42 | length 34.8
  Top Layer w0.2: C102.1@109.636,102.524 112.622,102.524 C103.1@112.903,102.243 ; C103.1@112.911,102.243 C105.1@114.808,102.243 ; C105.1@114.935,102.243 117.094,102.243 ; v2(117.094,101.854) 117.094,102.243 ; U9.32@117.729,102.743 117.229,102.243 117.094,102.243 ; v2(119.38,98.298) 119.38,98.29 119.753,97.917 C104.1@119.888,97.917 ; C104.1@120.023,97.917 C104.1@120.132,98.026 ; 120.132,98.044 121.629,98.044 122.305,98.72 U9.42@122.305,99.354 ; FB2.2@132.334,105.918 132.442,105.918 132.588,106.064 v2(132.588,106.553)
  Bottom Layer w0.2: v2(117.094,101.854) 118.237,100.711 118.237,99.441 v2(119.38,98.298) 128.016,106.934 132.207,106.934 v2(132.588,106.553)
NetC112_1: C112.1 R76.2 R79.2 | length 5.3
  Top Layer w0.2: R79.2@131.07,97.327 R79.2@131.318,97.575 ; R76.2@132.969,97.282 133.293,97.282 R76.2@133.35,97.225
  Top Layer w0.3: v2(131.07,96.647) R79.2@131.07,97.327 ; R76.2@133.223,97.663 C112.1@134.247,97.663 ; v2(133.35,96.647) R76.2@133.35,97.225
  Bottom Layer w0.3: v2(131.07,96.647) v2(133.35,96.647)
NetC113_1: C113.1 R77.2 R78.2 | length 8.7
  Top Layer w0.3: v2(128.143,96.647) R78.2@128.143,97.575 ; v2(129.667,96.647) R77.2@129.667,97.409 ; v2(133.223,98.425) 133.252,98.454 133.516,98.454 133.861,98.799 133.861,98.809 C113.1@134.112,99.06
  Bottom Layer w0.3: v2(128.143,96.647) v2(129.667,96.647) 131.445,98.425 v2(133.223,98.425)
NetC115_1: C115.1 R84.2 R86.2 R87.2 R88.2 | length 14.5
  Top Layer w0.2: R84.2@149.606,86.741 v2(150.622,86.741) ; R88.2@149.606,90.678 v2(150.622,90.678)
  Top Layer w0.45: R87.2@148.082,90.678 148.121,90.639 R88.2@149.606,90.639 ; R86.2@149.567,93.091 149.587,93.072 149.587,90.824 R88.2@149.606,90.805 ; R86.2@149.606,93.091 v2(149.606,94.107) ; v2(149.606,96.139) 149.609,96.142 C115.1@149.609,97.155
  Bottom Layer w0.2: v2(150.622,86.741) 151.384,87.503 151.384,89.916 v2(150.622,90.678)
  Bottom Layer w0.45: v2(149.606,94.107) v2(149.606,96.139)
NetC116_1: C116.1 J5.9 J5.10 J5.11 | length 30.2
  Top Layer w0.2: C116.1@149.731,82.929 149.731,83.212 149.857,83.338 150.14,83.338 151.765,84.963 v2(153.289,84.963) ; J5.11@160.522,98.475 162.383,98.475 165.735,95.123 J5.9@165.735,93.98
  Bottom Layer w0.2: v2(153.289,84.963) 155.522,87.196 155.522,93.419 J5.10@155.575,93.472 ; J5.10@155.522,93.525 155.522,95.832 158.242,98.552 160.445,98.552 J5.11@160.522,98.475
NetC117_1: C117.1 R91.2 R92.2 | length 9.3
  Top Layer w0.2: R91.2@127.381,110.324 v2(127.381,111.252) ; R92.2@129.286,110.617 v2(129.286,111.252) ; C117.1@134.112,108.839 C117.1@134.112,108.974
  Top Layer w0.3: v2(132.842,109.522) 133.564,109.522 C117.1@134.112,108.974
  Bottom Layer w0.3: v2(127.381,111.252) v2(129.286,111.252) 131.016,109.522 v2@132.794,109.522
NetC118_1: C118.1 R89.2 R90.2 | length 4.8
  Top Layer w0.2: R89.2@130.683,110.324 130.983,110.624 130.983,111.103 131.064,111.184 v2(131.064,111.252) ; R90.2@132.715,110.617 v2(132.715,111.252) ; R90.2@132.842,110.324 R90.2@132.93,110.236
  Top Layer w0.3: R90.2@132.93,110.236 C118.1@134.239,110.236
  Bottom Layer w0.3: v2(131.064,111.252) v2(132.715,111.252)
NetC119_1: C119.1 R98.2 R99.2 R100.2 R102.2 | length 13.8
  Top Layer w0.2: R102.2@148.209,119.468 148.297,119.38 R100.2@149.86,119.38 ; R100.2@149.86,119.468 150.837,119.468 v2(150.876,119.507) ; R100.2@149.86,119.634 149.821,119.673 R99.2@149.821,121.793 149.821,122.516 149.86,122.555 v2(149.86,122.682) ; v2(149.86,124.079) C119.1@149.86,124.968 ; R98.2@150.368,115.697 v2(151.003,115.697)
  Bottom Layer w0.2: v2(149.86,122.682) v2(149.86,124.079) ; v2(150.876,119.507) 150.92,119.463 151.174,119.463 152.019,118.618 152.019,116.459 151.213,115.653 151.047,115.653 v2(151.003,115.697)
NetC120_1: C120.1 J6.9 J6.10 J6.11 | length 24.9
  Top Layer w0.2: C120.1@149.482,110.109 150.495,110.109 v2@151.88,111.494 ; J6.11@160.522,120.821 162.262,120.821 165.522,117.561 165.522,115.91 J6.9@165.608,115.824
  Bottom Layer w0.2: v2(151.892,111.506) 155.197,114.811 155.197,115.573 J6.10@155.321,115.697 ; J6.10@155.522,115.821 155.575,115.874 155.575,117.729 158.623,120.777 J6.11@160.528,120.777
NetCC1_1: CC1.1 RC1.2 | length 3.3
  Top Layer w0.65: RC1.2@140.97,107.603 141.245,107.328 141.763,107.328 141.776,107.315 143.486,107.315 143.661,107.14 CC1.1@143.661,106.68
NetCg1_1: Cg1.1 QFuse1.4 RG1.2 | length 14.2
  Top Layer w0.85: 29.845,111.252 QFuse1.4@29.845,112.903
  Top Layer w0.9: 29.845,111.252 31.75,109.347 41.619,109.347
  other v4: 39.75,114.808 39.75,116.078
NetCitimer1_1: Citimer1.1 IC7.7 | length 4.9
  Top Layer w0.28: IC7.7@44.946,122.809 IC7.7@45.339,122.809
  Top Layer w0.3: Citimer1.1@41.771,125.984 41.771,125.934 42.021,125.684 42.071,125.684 IC7.7@44.946,122.809
NetCRetry1_1: CRetry1.1 IC7.10 | length 4.5
  Top Layer w0.254: CRetry1.1@41.466,119.507 42.418,119.507 44.196,121.285 IC7.10@45.212,121.285
NetD7_2: D7.2 R13.2 | length 1.4
  Top Layer w0.35: R13.2@74.549,104.648 D7.2@75.946,104.648
NetD11_1: D11.1 R55.1 | length 1.1
  Top Layer w0.4: D11.1@62.23,144.692 62.23,143.784 R55.1@62.357,143.657
NetDQ1_2: DQ1.2 QD1.1 QD1.2 QD1.3 QD2.1 QD2.2 QD2.3
  other v3: 63.881,122.174 62.865,130.81 62.738,136.017
NetENC1_RST: 
NetIC2_3: IC2.3 R6.1 | length 5
  Top Layer w0.6: IC2.3@45.034,101.026 47.386,103.378 48.681,103.378 48.81,103.507 R6.1@49.032,103.507
NetIC2_4: IC2.4 Rpl1.1 | length 0.3
  Top Layer w0.6: IC2.4@41.707,101.026 IC2.4@42.007,101.026
NetIC3_3: IC3.3 R7.1 | length 1.8
  Top Layer w0.55: IC3.3@72.898,111.887 R7.1@74.168,113.157
NetIC3_4: IC3.4 Rpl2.1 | length 1.9
  Top Layer w0.4: Rpl2.1@68.58,111.887 IC3.4@70.485,111.887
NetIC4_3: IC4.3 R8.1 R11.2
NetIC4_5: IC4.5 R9.1 R12.2 | length 30.5
  Top Layer w0.5: R12.2@16.002,91.804 16.052,91.754 16.285,91.754 16.345,91.694
  Top Layer w0.6: v3(37.719,90.932) 37.897,90.932 38.405,91.44 IC4.5@41.23,91.44
  Top Layer w0.65: 16.345,91.694 18.072,91.694 ; 18.137,91.694 18.257,91.574 19.383,90.448 19.661,90.17 R9.1@19.812,90.17 ; 18.211,91.528 18.276,91.382
  Top Layer w0.7: v3(17.272,90.297) 17.272,90.378 18.276,91.382
  GND Plane w1.2: v3@37.7,90.932 v3(37.719,90.932)
  PWR Plane w1.2: v3(17.272,90.297) 37.065,90.297 v3@37.7,90.932
NetIC7_6: IC7.6 R54.1 R56.2
NetIC7_8: IC7.8 RIlimit1.2 | length 4.8
  Top Layer w0.254: RIlimit1.2@41.34,124.333 42.291,124.333 44.323,122.301 IC7.8@45.339,122.301
NetIC7_9: IC7.9 RIMON1.2 | length 3.8
  Top Layer w0.3: RIMON1.2@41.564,122.174 41.949,121.789 IC7.9@45.204,121.789
NetIC7_12: IC7.12 R56.1 R60.2 | length 13.1
  Top Layer w0.254: v6(44.323,119.38) 44.418,119.475 44.418,119.656 IC7.12@45.043,120.282
  Top Layer w0.6: 50.277,125.334 50.277,126.604 50.753,127.08 50.753,127.722 R56.1@50.713,127.762 ; 50.277,125.376 50.277,124.348 v6(50.292,124.333)
  GND Plane w0.6: v6(44.323,119.38) 44.352,119.409 44.352,119.721 48.963,124.333 v6(50.292,124.333)
NetIC7_13: IC7.13 Rpg1.2 | length 10.4
  Top Layer w0.254: v12(45.225,118.999) 45.31,119.084 45.479,119.084 45.867,119.472 IC7.13@45.867,119.626
  Top Layer w0.7: Rpg1.2@51.903,118.491 51.943,118.531 51.943,120.001 52.197,120.255 v6(52.197,120.269)
  Bottom Layer w0.254: v12(45.225,118.999) 46.495,120.269 v6(52.197,120.269)
NetIC7_15: IC7.15 RG1.1 | length 3.1
  Top Layer w0.25: 46.867,118.106 IC7.15@46.867,119.626
  Top Layer w0.3: 46.867,118.106 47.117,117.856
  Top Layer w0.35: 47.117,116.586 47.117,117.856
  other v6: 46.482,114.3 46.482,115.443 46.482,116.586
NetIC7_17: IC7.17 IC7.18 IC7.19 IC7.20 IC7.21 IC7.22 IC7.23 IC7.24 QFuse1.5-6-7-8
  other v1: 34.035,105.395 35.235,105.395 33.435,106.595 34.635,106.595 35.835,106.595 34.035,107.795 35.235,107.795
  other v3: 33.528,111.633 35.179,111.633
  other v5: 50.419,121.285 50.419,122.555
NetJ5_1: J5.1 T1.16 | length 17
  Top Layer w0.2: T1.16@146.558,95.25 146.621,95.186 150.685,95.186 153.142,97.643 159.405,97.643 159.522,97.526 159.598,97.44 ccw(c160.481,98.218) 159.655,97.38 160.773,96.275 160.856,96.275 J5.1@161.922,96.275 ; J5.1@161.798,96.393 J5.1@161.798,96.399
NetJ5_2: J5.2 T1.14 | length 21
  Top Layer w0.2: T1.14@145.987,92.71 147.066,92.71 v2(147.828,91.948) ; v2(150.495,91.948) 155.829,97.282 159.244,97.282 160.768,95.758 160.782,95.758 160.979,95.561 160.979,95.249 161.112,95.116 161.424,95.116 161.665,94.875 J5.2@163.322,94.875
  Bottom Layer w0.2: v2(147.828,91.948) v2(150.495,91.948)
NetJ5_3: J5.3 T1.11 | length 20.6
  Top Layer w0.2: T1.11@145.987,88.9 146.159,88.728 146.995,88.728 148.093,87.63 155.208,87.63 156.732,89.154 162.02,89.154 ; 162.052,89.154 163.322,90.424 J5.3@163.322,92.075
NetJ5_4: J5.4 J5.5 R87.1 | length 15.3
  Top Layer w0.2: R87.1@147.955,88.773 148.071,88.773 148.795,88.049 153.835,88.049 156.461,90.675 159.128,90.675 J5.5@159.131,90.678 ; J5.5@159.195,90.742 159.261,90.675 J5.4@161.922,90.675
NetJ5_6: J5.6 T1.9 | length 15.5
  Top Layer w0.2: T1.9@146.431,86.233 146.558,86.106 154.503,86.106 v2(156.464,88.067)
  Bottom Layer w0.2: v2@156.464,88.011 157.734,89.281 J5.6@157.734,92.075
NetJ5_7: J5.7 J5.8 R88.1 | length 13.7
  Top Layer w0.2: R88.1@149.625,89.027 154.061,89.027 156.699,91.665 156.699,93.852 157.589,94.742 J5.7@157.734,94.742
  Bottom Layer w0.2: J5.7@157.734,94.996 157.843,94.996 J5.8@159.122,96.275
NetJ6_1: J6.1 T2.16 | length 17.5
  Top Layer w0.2: T2.16@146.368,123.063 146.566,123.261 156.139,123.261 160.204,119.196 161.347,119.196 161.798,118.745 J6.1@161.798,118.618
NetJ6_2: J6.2 T2.14 | length 18.8
  Top Layer w0.2: T2.14@146.368,120.523 v2(148.336,120.523) ; v2(150.622,120.523) 151.257,121.158 157.48,121.158 159.24,119.398 cw(c159.125,118.503) 159.871,119.01 160.655,117.856 160.714,117.797 161.29,117.221 J6.2@163.195,117.221
  Bottom Layer w0.2: v2(148.336,120.523) v2(150.622,120.523)
NetJ6_3: J6.3 T2.11 | length 21
  Top Layer w0.2: T2.11@146.368,116.713 146.622,116.459 152.4,116.459 156.845,112.014 162.814,112.014 163.322,112.522 J6.3@163.322,114.421
NetJ6_4: J6.4 J6.5 R100.1 | length 14
  Top Layer w0.2: R100.1@149.86,117.768 151.726,117.768 156.473,113.021 J6.5@159.122,113.021 ; J6.5@159.131,113.03 159.14,113.021 J6.4@161.922,113.021
NetJ6_6: J6.6 T2.9 | length 12.2
  Top Layer w0.2: T2.9@146.368,114.173 147.257,113.284 v2(154.559,113.284)
  Bottom Layer w0.2: v2(154.559,113.284) 156.585,113.284 J6.6@157.728,114.427
NetJ6_7: J6.7 J6.8 R102.1 | length 12.3
  Top Layer w0.2: R102.1@148.209,117.768 148.932,118.491 156.452,118.491 J6.7@157.722,117.221 ; J6.8@159.125,118.618 J6.8@159.131,118.618
  Bottom Layer w0.2: J6.7@157.734,117.221 157.734,117.233 J6.8@159.122,118.621
NetJADC1_14: JADC1.14 R22.1 | length 40.8
  Top Layer w0.2: JADC1.14@68.834,148.978 68.834,148.463 72.009,145.288 85.852,145.288 89.916,141.224 89.916,127.691 91.115,126.492 R22.1@92.137,126.492
NetJADC1_15: JADC1.15 R21.1 | length 37.8
  Top Layer w0.2: JADC1.15@71.604,148.58 71.638,148.58 74.295,145.923 86.233,145.923 90.551,141.605 90.551,127.762 91.186,127.127 91.629,127.127 91.857,127.355 91.907,127.355 92.137,127.585 R21.1@92.137,127.635
NetJADC1_17: JADC1.17 R20.1 | length 29.3
  Top Layer w0.2: JADC1.17@76.707,148.934 77.056,148.651 77.056,148.615 77.118,148.554 79.272,146.558 86.614,146.558 92.202,140.97 92.202,132.08 92.964,131.318 R20.1@93.558,131.318
NetJADC1_18: JADC1.18 R19.1 | length 26.2
  Top Layer w0.2: JADC1.18@80.01,148.59 80.01,148.336 81.153,147.193 86.868,147.193 92.748,141.313 92.748,132.423 92.964,132.207 93.28,132.207 93.508,132.435 93.558,132.435 93.788,132.665 R19.1@93.788,132.715
NetJADC1_20: JADC1.20 R50.1 | length 18.4
  Top Layer w0.2: JADC1.20@85.344,148.59 86.36,148.59 95.631,139.319 95.631,137.541 96.901,136.271 R50.1@97.598,136.271
NetJADC1_21: JADC1.21 R49.1 | length 14.6
  Top Layer w0.2: JADC1.21@88.224,148.58 88.224,147.615 97.384,138.455 97.384,137.947 R49.1@97.536,137.795
NetJADC1_23: JADC1.23 R48.1 | length 11.6
  Top Layer w0.2: JADC1.23@93.726,148.902 93.726,145.796 98.679,140.843 R48.1@100.138,140.843
NetJADC1_24: JADC1.24 R47.1 | length 10.2
  Top Layer w0.2: JADC1.24@96.534,148.58 95.631,147.677 95.631,144.907 98.933,141.605 99.68,141.605 100.138,142.063 R47.1@100.138,142.113
NetJPyro1_M1: JPyro1.M1 JPyro1.M2
NetLED1_1: LED1.1 R51.2 | length 1
  Top Layer w0.254: LED1.1@60.706,143.637 R51.2@60.706,144.638
NetLED2_1: LED2.1 R61.2 | length 3.3
  Top Layer w0.254: R61.2@29.083,140.589 30.226,140.589 LED2.1@31.75,142.113
NetLED3_1: LED3.1 R94.2 U9.44 | length 12.9
  Top Layer w0.2: R94.2@118.618,94.272 119.295,93.595 119.295,88.356 LED3.1@119.077,88.138 ; R94.2@118.872,94.234 U9.44@123.317,98.679
  Top Layer w0.3: LED3.1@118.999,88.138 LED3.1@119.077,88.138
NetLED3_2: LED3.2 R97.2 | length 1.9
  Top Layer w0.3: LED3.2@118.999,87.175 118.999,86.614 119.638,85.975 119.754,85.975 119.888,85.841 R97.2@119.888,85.725
NetLED4_1: LED4.1 U9.43 | length 14
  Top Layer w0.2: LED4.1@117.856,88.208 117.856,95.123 118.385,95.652 119.737,95.652 122.805,98.72 U9.43@122.805,99.354
NetLED4_2: LED4.2 R101.2 | length 3.8
  Top Layer w0.3: LED4.2@117.729,87.175 117.729,86.475 119.753,84.451 119.761,84.444 R101.2@119.761,84.201
NetLED5_1: LED5.1 R95.2 U9.46 | length 8.8
  Top Layer w0.2: R95.2@122.047,93.611 122.924,93.611 ; LED5.1@122.809,92.075 122.839,92.075 122.936,92.172 122.936,93.611 122.936,97.08 124.276,98.42 U9.46@124.276,99.325
NetLED5_2: LED5.2 R103.2 | length 1
  Top Layer w0.2: LED5.2@122.809,91.112 122.89,91.031 122.89,90.216 R103.2@122.936,90.17
NetLED6_1: LED6.1 R96.2 U9.45 | length 8.6
  Top Layer w0.2: LED6.1@121.539,92.075 121.539,92.71 120.535,93.714 120.535,94.056 R96.2@120.269,94.322 120.269,95.123 U9.45@123.825,98.679
NetLED6_2: LED6.2 R104.2 | length 1.1
  Top Layer w0.2: R104.2@121.539,90.043 LED6.2@121.539,91.112
NetR1_2: R1.2 R3.1 U1.3 | length 1
  Top Layer w0.5: v4(67.437,74.041) 67.437,75.057
NetR2_1: R2.1 R4.2 U2.3 | length 8.3
  Top Layer w0.254: R4.2@56.319,95.758 56.359,95.718 56.359,95.279 58.807,92.831 U2.3@60.839,92.831
  Top Layer w0.4: R2.1@54.195,96.393 55.626,96.393 R4.2@56.261,95.758
NetR16_2: R16.2 U4.7 | length 3.6
  Top Layer w0.35: U4.7@119.38,76.962 U4.7@119.507,76.835 119.634,76.708 119.634,75.946 R16.2@121.417,74.163
NetR53_1: R53.1 R55.2 R57.1 R58.1 | length 32
  Top Layer w0.4: R55.2@62.23,142.367 R55.2@62.23,142.352 62.23,141.732 62.484,141.478 v9(64.389,141.478) 64.389,141.573 63.881,142.081 63.881,142.506 R58.1@63.754,142.633
  Top Layer w0.5: R57.1@43.307,140.35 R53.1@51.435,140.35
  Bottom Layer w0.3: v3(45.212,140.462) 63.373,140.462 v9(64.389,141.478)
NetR62_1_1: R62_1.1 R63_1.2 RS1_1.2
NetR62_2_1: R62_2.1 R63_2.2 RS1_2.2
NetR62_3_1: R62_3.1 R63_3.2 RS1_3.2
NetR64_1_2: R64_1.2 U7_1.2 | length 3.7
  Top Layer w0.5: U7_1.2@53.721,69.372 53.871,69.522 53.871,71.905 54.033,72.067 R64_1.2@54.033,72.898